# EAGLE board testes-led (EAGLE 9.7.0)

Size 308.6 x 322.12 mm. Coordinates in mm from the lower left corner, seen from the top.
Outline: 0,0 308.6,0 308.6,322.12 0,322.12 0,0
Copper layers (1*16): Top 0.035mm / dielectric 1.5mm / Bottom 0.035mm
Design rules "default": minimum track width 6mil, minimum drill 0.35mm, track to track 6mil, track to pad 6mil, pad to pad 6mil, via to via 6mil, smd to smd 6mil, copper to edge 40mil, drill to drill 6mil, minimum pad ring 10mil, minimum via ring 8mil, stop-mask expansion 4mil, vias tented up to drill 0mil, thermal gap 10mil

## Footprints (pad centres in the part's own frame; a part is rotated, then mirrored left to right if it is on the bottom)
BAT_3002 = smd 3.96 x 3.96: N 0,0.65 | smd 5.08 x 5.08: P 12.825,0.65; P1 -12.825,0.65
BATTERY-GENERIC = drill 1.118 pad 3.15 octagon: + 2.54,0; - -2.54,0
LEDRD254W60D565H860B_G = drill 0.981 pad 1.581: 1 -1.27,0; 2 1.27,0
LEDRD254W60D565H860B = drill 0.981 pad 1.581: 1 -1.27,0; 2 1.27,0
RESAD1016W63L850D250B = drill 0.83 pad 1.43: 1 -5.08,0; 2 5.08,0
HA-06-SM065 = drill 1 pad 1.676: 1 -2.54,-2.54; 2 0,2.54; 3 2.54,-2.54

## Placement (x,y rotation side)
BAT2  BR2016  [BAT_3002]  85.49,284.28 90 top
BAT3  BR2016  [BAT_3002]  15.76,286.83 90 top
BAT4  9V  [BATTERY-GENERIC]  75.07,207.25 90 top
BAT5  9V  [BATTERY-GENERIC]  180.88,206.91 90 top
BAT6  9V  [BATTERY-GENERIC]  264.62,207.71 90 top
BAT7  9V  [BATTERY-GENERIC]  75.66,113.77 90 top
BAT8  9V  [BATTERY-GENERIC]  74.46,8.26 90 top
D1  GREEN  [LEDRD254W60D565H860B_G]  110.37,314.07 0 top
D2  RED  [LEDRD254W60D565H860B]  96.34,241.8 0 top
D3  RED  [LEDRD254W60D565H860B]  35.52,308.21 0 top
D4  RED  [LEDRD254W60D565H860B]  187.36,245.01 0 top
D5  RED  [LEDRD254W60D565H860B]  302.54,241.91 0 top
D6  RED  [LEDRD254W60D565H860B]  113.58,147.97 0 top
D7  RED  [LEDRD254W60D565H860B]  114.66,139.77 270 top
D8  RED  [LEDRD254W60D565H860B]  112.38,42.46 0 top
D9  RED  [LEDRD254W60D565H860B]  113.46,34.26 270 top
R1  350  [RESAD1016W63L850D250B]  270.15,221.3 90 top
R2  250  [RESAD1016W63L850D250B]  81.19,127.35 90 top
R3  250  [RESAD1016W63L850D250B]  79.99,21.84 90 top
RPOT1  1k  [HA-06-SM065]  80.18,313.7 90 top
RPOT2  250k  [HA-06-SM065]  34.94,241.98 90 top
RPOT3  250k  [HA-06-SM065]  140.75,241.63 90 top

## Library data of the parts
BAT2 BAT3 = Tinkercad; CATEGORY: Battery-Holder; CELL_DIAMETER: 20mm; DESCRIPTION: Battery Retainer Coin, 20.0mm 1 Cell SMD (SMT) Tab; MANUFACTURER: Keystone Electronics; MPN: 3002; PART_STATUS: ACTIVE; ROHS_COMPLIANT: COMPLIANT; SERIES: -; SUB_CATEGORY: Holder; TYPE: Coin Cell
BAT4-BAT8 R1-R3 RPOT1-RPOT3 = Tinkercad
D1 = Tinkercad; CATEGORY: Opto-Electronic; SUB-CATEGORY: LED; VALUE: LED_GREEN
D2-D9 = Tinkercad; CATEGORY: Opto-Electronic; SUB-CATEGORY: LED; VALUE: LED_RED

## Nets
BAT2+: BAT2.P BAT2.P1 RPOT1.1
BAT2-: BAT2.N D1.2
BAT3+: BAT3.P BAT3.P1 D3.1
BAT3-: BAT3.N D3.2
BAT4+: BAT4.+ RPOT2.1
BAT4-: BAT4.- D2.2
BAT5+: BAT5.+ RPOT3.1
BAT5-: BAT5.- D4.2
BAT6+: BAT6.+ R1.1
BAT6-: BAT6.- D5.2
BAT7+: BAT7.+ R2.1
BAT7-: BAT7.- D7.2
BAT8+: BAT8.+ R3.1
BAT8-: BAT8.- D9.2
D1_A: D1.1 RPOT1.2
D2_A: D2.1 RPOT2.2
D6_C: D6.2 D7.1
D8_C: D8.2 D9.1

## Tracks (layer width: path | path; a pad name or v marks a point on that pad's centre or on a via)
BAT2+  (2 unrouted)
BAT2-  (1 unrouted)
BAT3+  (2 unrouted)
BAT3-  (1 unrouted)
BAT4+  (1 unrouted)
BAT4-  (1 unrouted)
BAT5+  (1 unrouted)
BAT5-  (1 unrouted)
BAT6+  (1 unrouted)
BAT6-  (1 unrouted)
BAT7+  (1 unrouted)
BAT7-  (1 unrouted)
BAT8+  (1 unrouted)
BAT8-  (1 unrouted)
D1_A  (1 unrouted)
D2_A  (1 unrouted)
D6_C  (1 unrouted)
D8_C  (1 unrouted)